# Altium PCB RUMBA_V2.PcbDoc (part 1 of 2)
Units mm, origin at the board's own origin, x right, y up, seen from the top; angles counter-clockwise.
Board outline 135 x 75 mm, 2 copper layers (Top Layer, Bottom Layer); 186 components, 178 nets, 812 pads, 160 vias.
Unrouted connection lines stored in the file: 153.
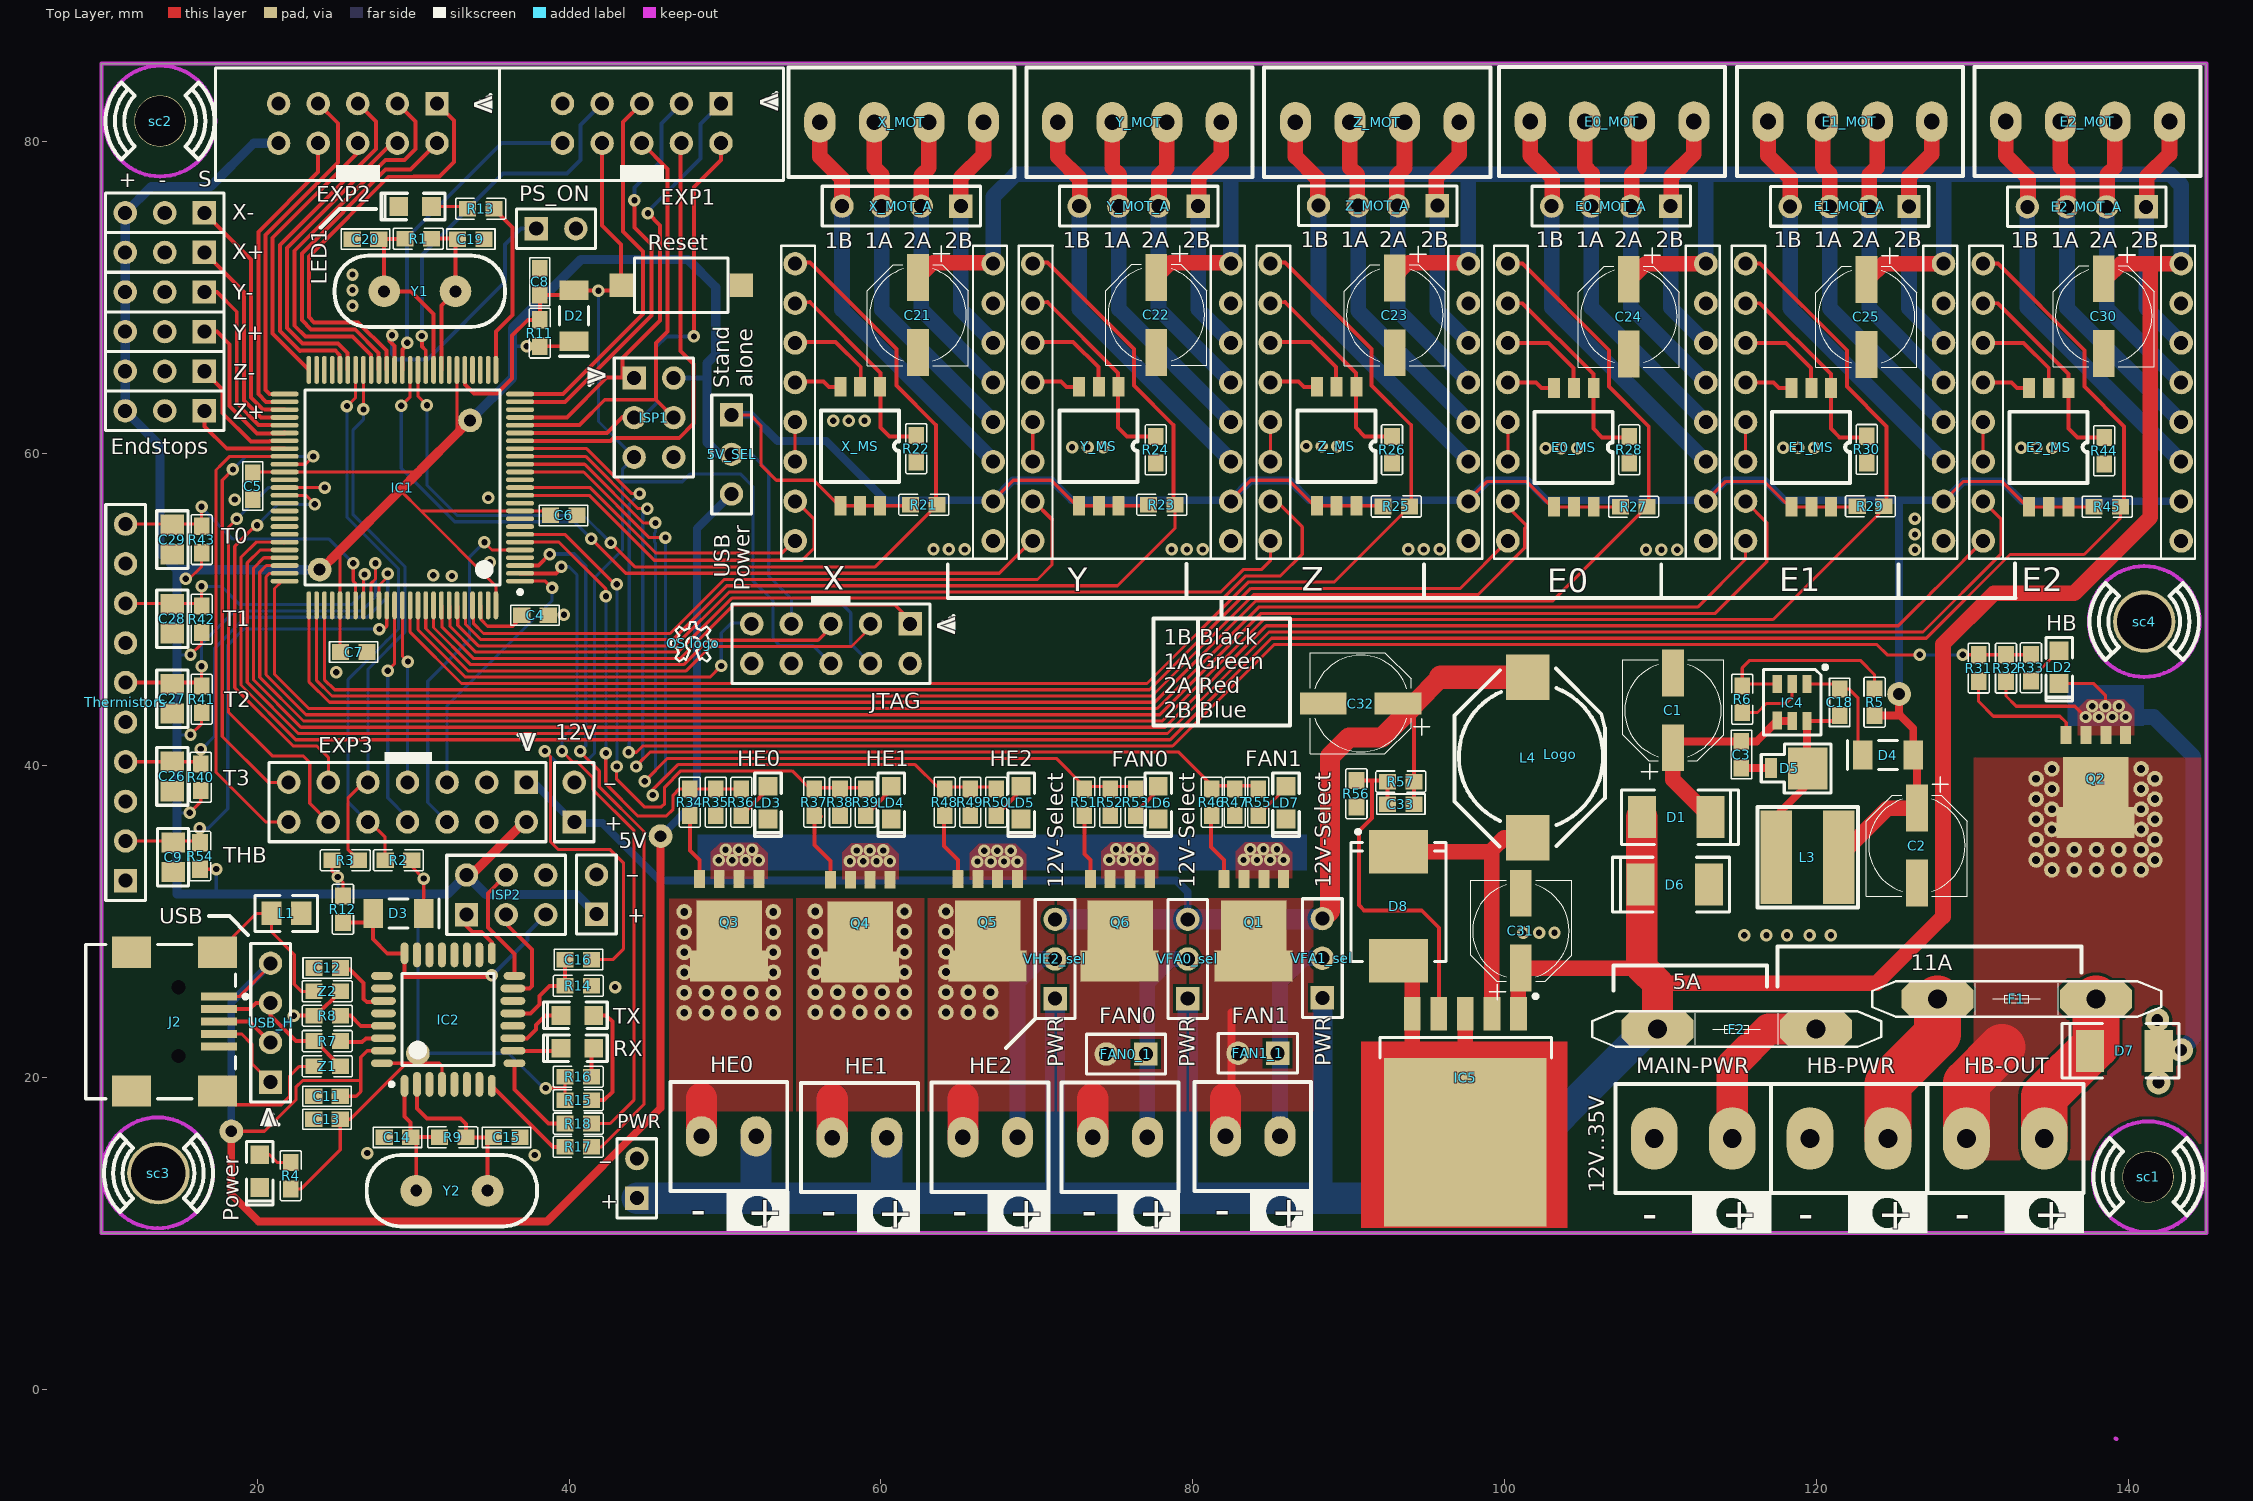
[diagram p0: Top Layer view]
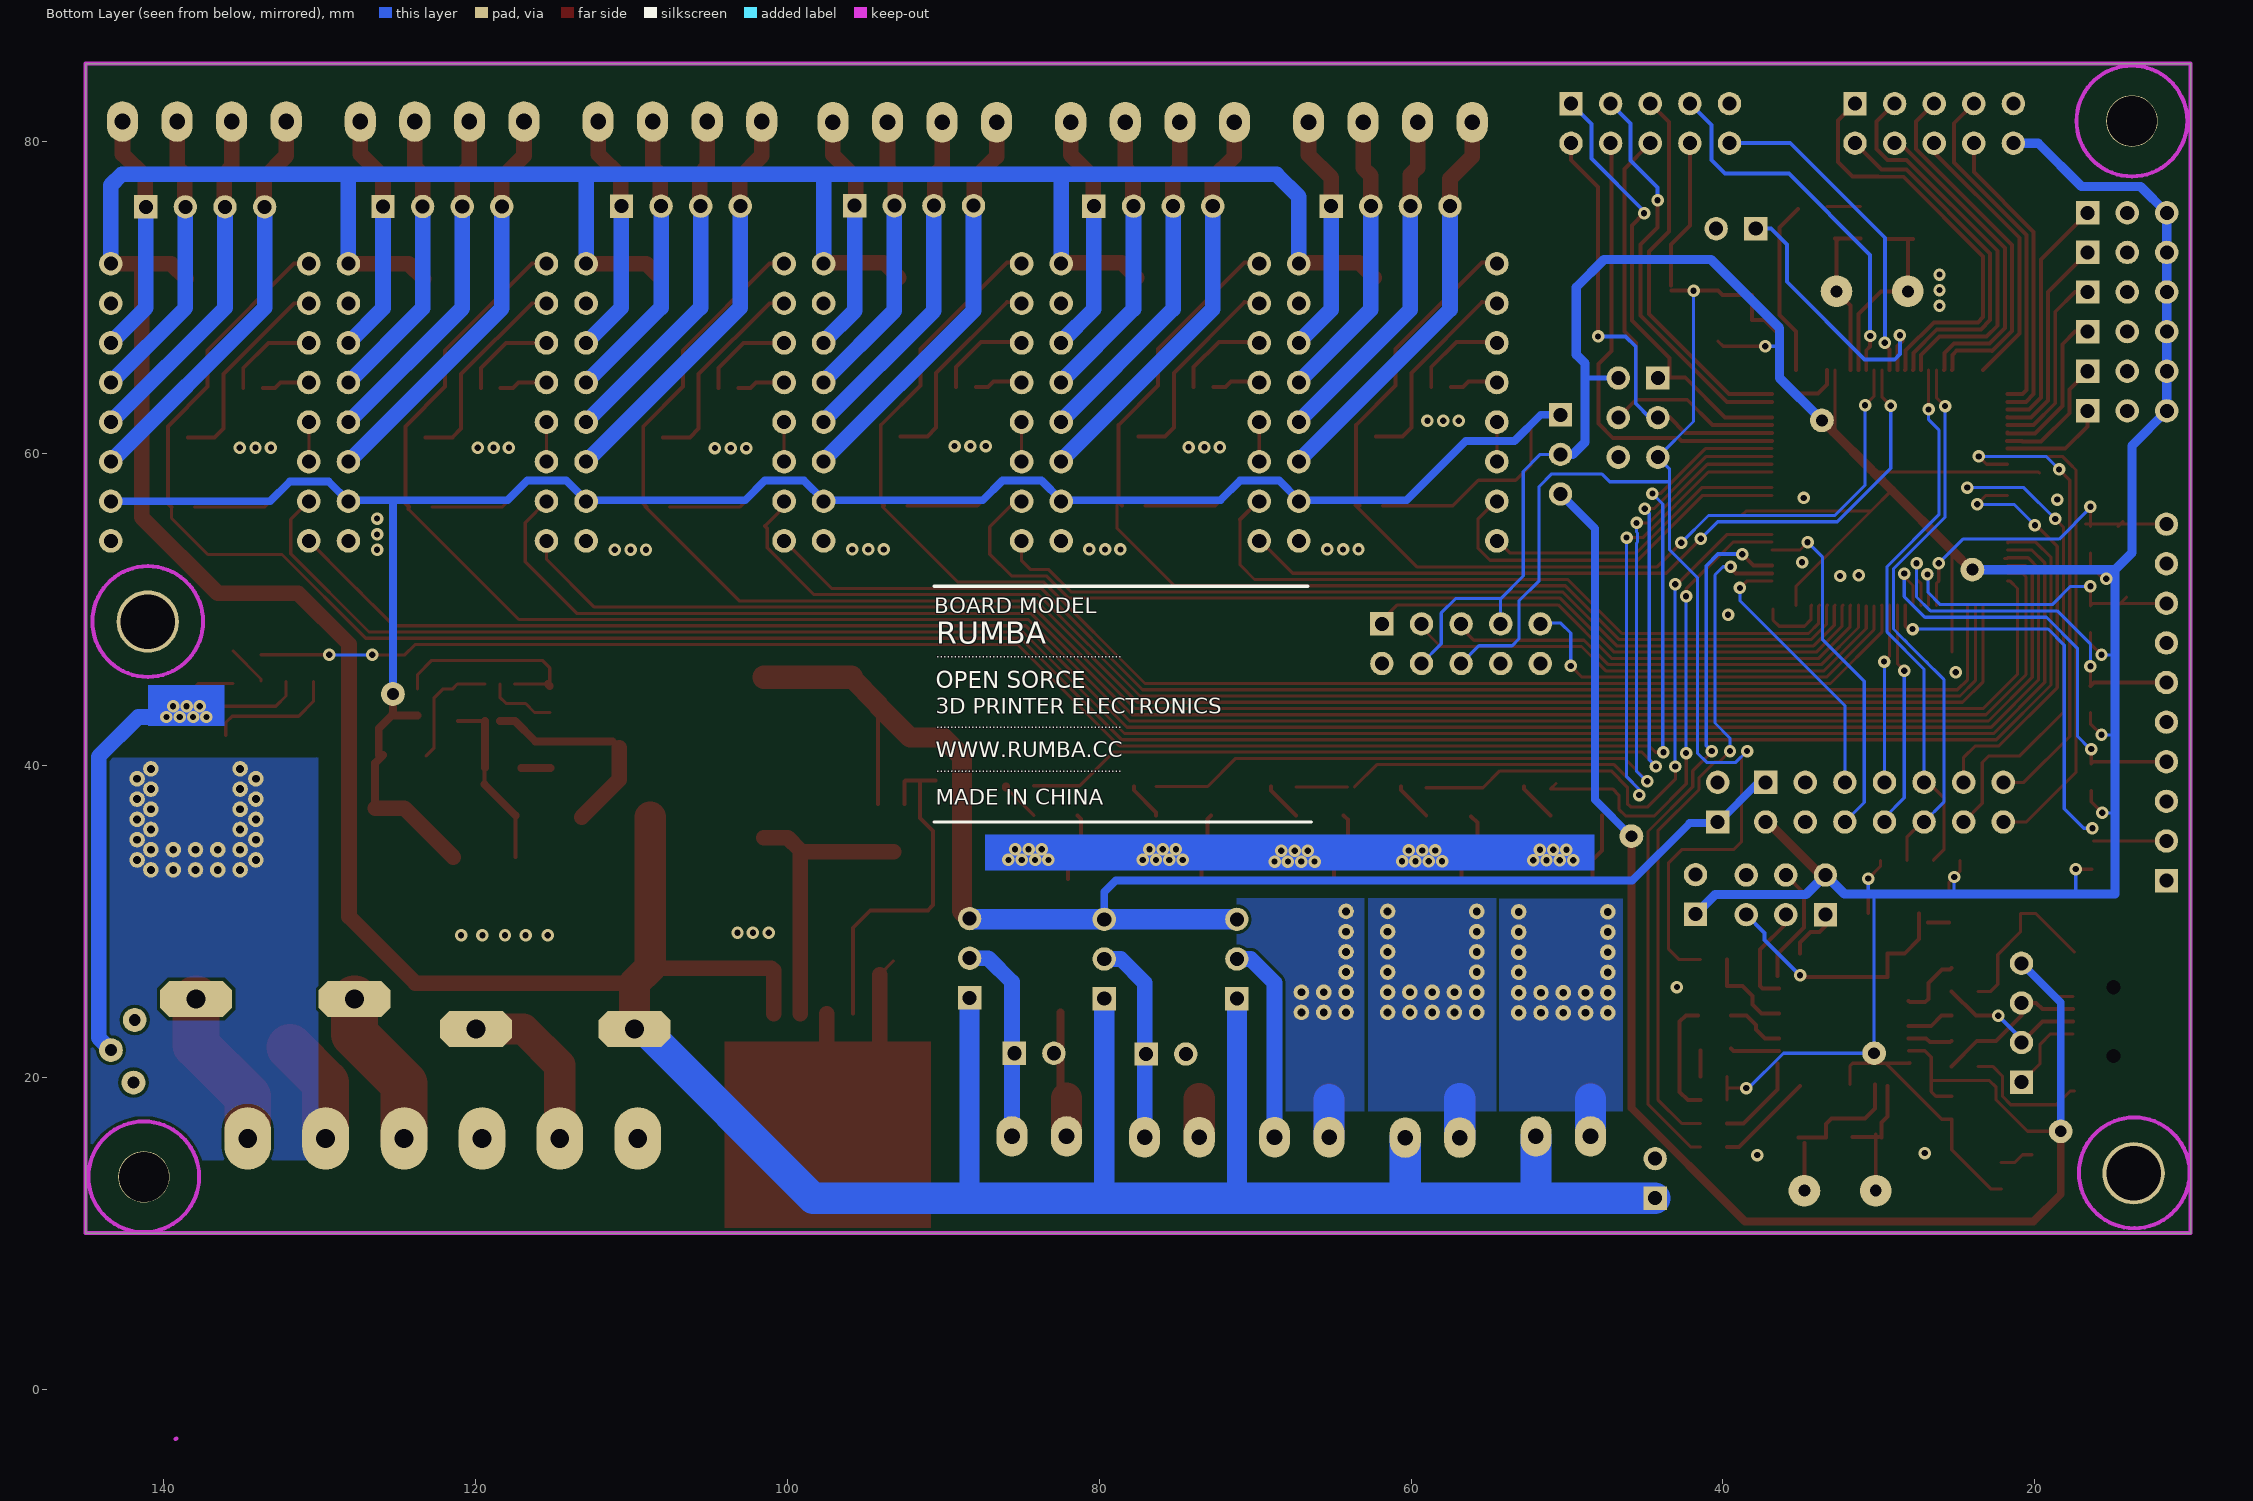
[diagram p1: Bottom Layer view, seen from below]
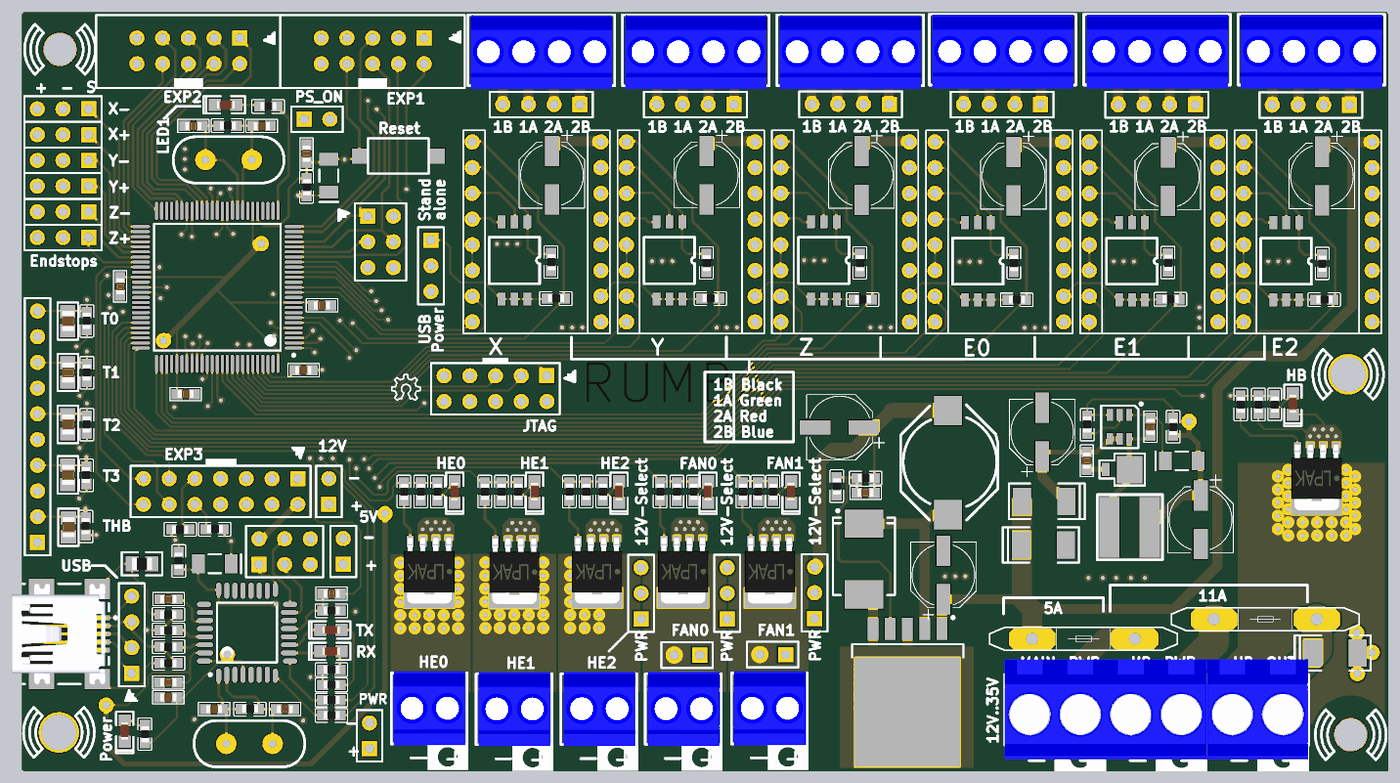
[diagram p3: 3D render of the assembled board from above, using the file's embedded part models]

## Layer stack, top to bottom
Top Layer: signal copper 0.0356
Dielectric: dielectric 0.32, FR-4, Dk 4.8
Bottom Layer: signal copper 0.0356

## Board outline
10,10 10,85 145,85 145,10

## Design rules (kind name [scope] priority, off if disabled: settings)
Clearance [All] p1: gap=0.2
HoleSize [All] p1: absolutevalues=TRUE maxlimit=4 minlimit=0.025 maxpercent=80.000 minpercent=20.000
MinimumSolderMaskSliver [All] p1: minsoldermaskwidth=0
PolygonConnect PolygonConnect_1 [All] p1: connectstyle=Relief reliefconductorwidth=0.254 reliefentries=4 polygonreliefangle="90 Angle"
RoutingVias [All] p1: holewidth=0.4 width=0.8 viastyle="Through Hole" minholewidth=0.2 minwidth=0.6 maxholewidth=1 maxwidth=1.27
SilkToSilkClearance [All] p1: silktosilkclearance=0.1
SilkscreenOverComponentPads [All] p1: minsilkscreentomaskgap=0
SolderMaskExpansion [All] p1: expansion=0.102
Width Width_1 [All] p1: maxlimit=3 minlimit=0.1 preferedwidth=0.2 minimp=50.000000 maximp=50.000000 favimp=50.000000
24 further rules are at their usual default settings.

## Components (designator, comment, footprint, x,y, rotation, side; value= is the part's Value field where it differs from the comment)
5V "Header 2" HDR1X2 41.758,30.455 r90 top
5V_SEL "Header 3" HDR1X3 50.419,62.484 r270 top
12V "Header 2" HDR1X2 40.335,36.373 r90 top
C1 "Cap Pol3" "CAP EL PANASONIC" 110.795,45.974 r180 top
C2 "Cap Pol3" "CAP EL PANASONIC" 126.441,32.41 r0 top
C3 "Cap Semi" "CAP 1608-0603" 115.189,40.691 r90 top
C4 "Cap Semi" "CAP 1608-0603" 37.821,49.632 r180 top
C5 "Cap Semi" "CAP 1608-0603" 19.71,57.912 r90 top
C6 "Cap Semi" "CAP 1608-0603" 39.649,56.032 r180 top
C7 "Cap Semi" "CAP 1608-0603" 26.187,47.269 r180 top
C8 "Cap Semi" "CAP 1608-0603" 38.125,71.018 r270 top
C9 "Cap Semi" Cap2012-0805 14.605,34.112 r90 top
C11 "Cap Semi" "CAP 1608-0603" 24.475,18.778 r0 top
C12 "Cap Semi" "CAP 1608-0603" 24.488,27.008 r0 top
C13 "Cap Semi" "CAP 1608-0603" 24.475,17.305 r0 top
C14 "Cap Semi" "CAP 1608-0603" 28.996,16.143 r0 top
C15 "Cap Semi" "CAP 1608-0603" 35.996,16.143 r180 top
C16 "Cap Semi" "CAP 1608-0603" 40.6,27.546 r180 top
C18 "Cap Semi" "CAP 1608-0603" 121.488,44.044 r90 top
C19 "Cap Semi" "CAP 1608-0603" 33.699,73.752 r180 top
C20 "Cap Semi" "CAP 1608-0603" 26.949,73.752 r0 top
C21 "Cap Pol3" "CAP EL PANASONIC" 62.374,66.434 r0 top
C22 "Cap Pol3" "CAP EL PANASONIC" 77.665,66.436 r0 top
C23 "Cap Pol3" "CAP EL PANASONIC" 92.956,66.41 r0 top
C24 "Cap Pol3" "CAP EL PANASONIC" 107.968,66.334 r0 top
C25 "Cap Pol3" "CAP EL PANASONIC" 123.208,66.309 r0 top
C26 "Cap Semi" Cap2012-0805 14.554,39.294 r90 top
C27 "Cap Semi" Cap2012-0805 14.554,44.272 r90 top
C28 "Cap Semi" Cap2012-0805 14.554,49.403 r90 top
C29 "Cap Semi" Cap2012-0805 14.554,54.483 r90 top
C30 "Cap Pol3" "CAP EL PANASONIC" 138.422,66.36 r0 top
C31 "Cap Pol3" "CAP EL PANASONIC" 101.041,31.852 r180 top
C32 "Cap Pol3" "CAP EL PANASONIC" 88.316,43.967 r270 top
C33 "Cap Semi" "Cap 1608-0603" 93.346,37.516 r180 top
D1 "M4" "1N4007 SMD" 107.391,38.557 r270 top
D2 "CD1206-S01575" "1N4148 SMD" 40.324,68.842 r90 top
D3 "CD1206-S01575" "1N4148 SMD" 29.058,30.505 r180 top
D4 "Diode" "1N4148 SMD" 124.587,40.665 r0 top
D5 "Diode schottky" MBRM140 119.431,39.802 r180 top
D6 "M4" "1N4007 SMD" 114.529,30.48 r90 top
D7 "M4" "1N4007 SMD" 143.358,19.812 r90 top
D8 "MURS320" MURS320 93.193,30.963 r90 top
E0 "A4988BREAKOUT" A4988BREAKOUT 100.211,72.176 r270 top locked
E0_MOT "Header 4" "TERM4 3.5MM" 101.643,81.295 r0 top
E0_MOT_A "Header 4" HDR1X4 110.642,75.87 r180 top
E0_MS "SW DIP-3" "DIPSW SO6" 105.716,64.204 r270 top
E1 "A4988BREAKOUT" A4988BREAKOUT 115.451,72.176 r270 top locked
E1_MOT "Header 4" "TERM4 3.5MM" 116.893,81.295 r0 top
E1_MOT_A "Header 4" HDR1X4 125.933,75.844 r180 top
E1_MS "SW DIP-3" "DIPSW SO6" 120.942,64.204 r270 top
E2 "A4988BREAKOUT" A4988BREAKOUT 130.691,72.176 r270 top locked
E2_MOT "Header 4" "TERM4 3.5MM" 132.143,81.295 r0 top
E2_MOT_A "Header 4" HDR1X4 141.148,75.819 r180 top
E2_MS "SW DIP-3" "DIPSW SO6" 136.168,64.204 r270 top
EXP1 "Header 5X2" "HDR2X5_EXP INER ONLY\" 53.746,84.746 r180 top
EXP2 "Header 5X2" "HDR2X5_EXP INER ONLY\" 35.535,84.746 r180 top
EXP3 "Header 7X2" HDR2X7 37.262,38.913 r180 top
F1 "MFR1100" MFR500 132.842,25.019 r0 top
F2 "MFR500" MFR500 114.884,23.089 r180 top
FAN0 "PORT 2 pina_0.2" "TERM2 3.5mm" 77.089,16.154 r180 top
FAN0_1 "PORT 2 pina_0.2" HDR1X2 76.987,21.488 r180 top
FAN1 "PORT 2 pina_0.2" "TERM2 3.5mm" 85.598,16.205 r180 top
FAN1_1 "PORT 2 pina_0.2" HDR1X2 85.446,21.539 r180 top
HB-OUT "PORT 2 pina_0.2" "TERM2 5MM" 129.616,16.078 r0 top
HB-PWR "PORT 2 pina_0.2" "TERM2 5MM" 119.583,16.078 r0 top
HE0 "PORT 2 pina_0.2" "TERM2 3.5MM" 51.994,16.205 r180 top
HE1 "PORT 2 pina_0.2" "TERM2 3.5MM" 60.376,16.129 r180 top
HE2 "PORT 2 pina_0.2" "TERM2 3.5mm" 68.758,16.154 r180 top
IC1 "ATMEGA2560" TQFP100N 29.31,57.817 r180 top locked
IC2 "ATMEGA16U2-AU" TQFP32N 32.248,23.697 r90 top
IC4 "LT1933ES6" SOT23-6N 118.44,44.044 r270 top
IC5 "LM2596" TO-263 97.486,18.491 r270 top
ISP1 "Header 3X2" HDR2X3 44.171,64.846 r270 top
ISP2 "Header 3X2" HDR2X3 33.426,30.429 r0 top
J2 "USB conector" USB_MINI/SM0.8-6H5 9.703,23.571 r180 top
JTAG "Header 5X2" HDR2X5 61.874,49.073 r180 top
L1 "Zavojnica" "RES 2012-0805" 21.869,30.505 r0 top
L3 "Zavojnica" INDUCTOR_MSS6122D 117.424,34.112 r270 top
L4 "Inductor" DO3316P 101.498,35.357 r90 top
LD2 "GREEN" "LED 0805" 135.56,47.346 r270 top
LD3 "GREEN" "LED 0805" 52.756,38.659 r270 top
LD4 "GREEN" "LED 0805" 60.658,38.659 r270 top
LD5 "GREEN" "LED 0805" 68.99,38.659 r270 top
LD6 "GREEN" "LED 0805" 77.778,38.659 r270 top
LD7 "GREEN" "LED 0805" 85.979,38.659 r270 top
LED1 "YELLOW" "LED 0805" 31.183,75.844 r180 top
Logo "Logo" "TAURINO LOGO HIGH" 103.556,40.716 r270 top
MAIN-PWR "PORT 2 pina_0.2" "TERM2 5MM" 109.601,16.078 r0 top (schematic designator Main-PWR)
"OS logo" "Logo" "OS LOGO TOP" 47.981,47.828 r0 top
Power "GREEN" "LED 0805" 20.168,15.029 r270 top
PS_ON "Header 2" HDR1X2 37.897,74.422 r0 top
PWR "Header 2" HDR1X2 44.348,12.243 r90 top
Q1 "PSMN7R0-60YS" LFPACK 85.827,32.727 r180 top
Q2 "PSMN7R0-60YS" LFPACK 139.827,41.935 r180 top
Q3 "PSMN7R0-60YS" LFPACK 52.174,32.727 r180 top
Q4 "PSMN7R0-60YS" LFPACK 60.579,32.664 r180 top
Q5 "PSMN7R0-60YS" LFPACK 68.759,32.727 r180 top
Q6 "PSMN7R0-60YS" LFPACK 77.242,32.727 r180 top
R1 "Res3" "RES 1608-0603" 30.328,73.782 r0 top
R2 "Res3" "RES 1608-0603" 29.058,33.909 r0 top
R3 "Res3" "RES 1608-0603" 25.654,33.909 r180 top
R4 "Res3" "RES 1608-0603" 22.149,13.691 r270 top
R5 "Res3" "RES 1608-0603" 123.723,44.044 r270 top
R6 "Res3" "RES 1608-0603" 115.24,44.247 r90 top
R7 "Res3" "RES 1608-0603" 24.498,22.324 r180 top
R8 "Res3" "RES 1608-0603" 24.498,23.947 r180 top
R9 "Res3" "RES 1608-0603" 32.537,16.154 r0 top
R11 "Res3" "RES 1608-0603" 38.132,67.729 r270 top
R12 "Res3" "RES 1608-0603" 25.502,30.785 r90 top
R13 "Res3" "RES 1608-0603" 34.333,75.692 r0 top
R14 "Res3" "RES 1608-0603" 40.589,25.857 r0 top
R15 "Res3" "RES 1608-0603" 40.584,18.531 r0 top
R16 "Res3" "RES 1608-0603" 40.584,20.031 r0 top
R17 "Res3" "RES 1608-0603" 40.584,15.531 r0 top
R18 "Res3" "RES 1608-0603" 40.584,17.031 r0 top
R21 "Res3" "RES 1608-0603" 62.756,56.708 r0 top
R22 "Res3" "RES 1608-0603" 62.273,60.314 r270 top
R23 "Res3" "RES 1608-0603" 78.021,56.708 r0 top
R24 "Res3" "RES 1608-0603" 77.615,60.238 r270 top
R25 "Res3" "RES 1608-0603" 93.058,56.606 r0 top
R26 "Res3" "RES 1608-0603" 92.778,60.238 r270 top
R27 "Res3" "RES 1608-0603" 108.272,56.581 r0 top
R28 "Res3" "RES 1608-0603" 107.993,60.238 r270 top
R29 "Res3" "RES 1608-0603" 123.462,56.631 r0 top
R30 "Res3" "RES 1608-0603" 123.221,60.262 r270 top
R31 "Res3" "RES 1608-0603" 130.404,46.242 r270 top
R32 "Res3" "RES 1608-0603" 132.156,46.242 r270 top
R33 "Res3" "RES 1608-0603" 133.756,46.253 r270 top
R34 "Res3" "RES 1608-0603" 47.751,37.643 r270 top
R35 "Res3" "RES 1608-0603" 49.402,37.643 r270 top
R36 "Res3" "RES 1608-0603" 51.053,37.643 r270 top
R37 "Res3" "RES 1608-0603" 55.727,37.643 r270 top
R38 "Res3" "RES 1608-0603" 57.378,37.643 r270 top
R39 "Res3" "RES 1608-0603" 59.029,37.643 r270 top
R40 "Res3" "RES 1608-0603" 16.383,39.243 r90 top
R41 "Res3" "RES 1608-0603" 16.434,44.247 r90 top
R42 "Res3" "RES 1608-0603" 16.434,49.378 r90 top
R43 "Res3" "RES 1608-0603" 16.434,54.483 r90 top
R44 "Res3" "RES 1608-0603" 138.447,60.182 r270 top
R45 "Res3" "RES 1608-0603" 138.652,56.585 r0 top
R46 "Res3" "RES 1608-0603" 81.229,37.643 r270 top
R47 "Res3" "RES 1608-0603" 82.702,37.643 r270 top
R48 "Res3" "RES 1608-0603" 64.084,37.643 r270 top
R49 "Res3" "RES 1608-0603" 65.735,37.643 r270 top
R50 "Res3" "RES 1608-0603" 67.386,37.643 r270 top
R51 "Res3" "RES 1608-0603" 73.05,37.643 r270 top
R52 "Res3" "RES 1608-0603" 74.701,37.643 r270 top
R53 "Res3" "RES 1608-0603" 76.352,37.643 r270 top
R54 "Res3" "RES 1608-0603" 16.332,34.188 r90 top
R55 "Res3" "RES 1608-0603" 84.201,37.643 r270 top
R56 "Res3" "RES 1608-0603" 90.5,38.176 r270 top
R57 "Res3" "RES 1608-0603" 93.346,38.964 r0 top
Reset "" "SW-PB SMD 2PIN" 47.193,70.79 r180 top
RX "YELLOW" "LED 0805" 41.589,21.857 r180 top
sc1 "Sraf" "SRAF 3MM - RUPA 3.2" 141.275,13.614 r45 top
sc2 "Sraf" "SRAF 3MM - RUPA 3.2" 13.773,81.325 r45 top
sc3 "Sraf" "Sraf 3mm - rupa 3.5" 13.665,13.843 r45 top
sc4 "Sraf" "SRAF 3MM - RUPA 3.5" 141.021,49.225 r45 top
Thermistors "Header 10" HDR1X10 11.557,32.614 r90 top
TX "YELLOW" "LED 0805" 41.589,23.966 r180 top
USB_H "Header 4" HDR1X4 20.853,19.685 r90 top
VFA0_sel "Header 3" HDR1X3 79.68,25.044 r90 top
VFA1_sel "Header 3" HDR1X3 88.316,25.095 r90 top
VHE2_sel "Header 3" HDR1X3 71.171,25.044 r90 top
X "A4988BREAKOUT" A4988BREAKOUT 54.499,72.176 r270 top locked
X+ "Header 3" HDR1X3 16.612,72.898 r180 top (schematic designator Xmax)
X- "Header 3" HDR1X3 16.612,75.438 r180 top (schematic designator Xmin)
X_MOT "Header 4" "TERM4 3.5MM" 56.081,81.244 r0 top locked
X_MOT_A "Header 4" HDR1X4 65.126,75.87 r180 top
X_MS "SW DIP-3" "DIPSW SO6" 59.941,64.278 r270 top
Y "A4988BREAKOUT" A4988BREAKOUT 69.739,72.176 r270 top locked
Y1 "16MHz" X-TAL 32.716,70.404 r180 top
Y2 "16MHz" X-TAL 34.773,12.725 r180 top
Y+ "Header 3" HDR1X3 16.612,67.818 r180 top (schematic designator Ymax)
Y- "Header 3" HDR1X3 16.612,70.358 r180 top (schematic designator Ymin)
Y_MOT "Header 4" "TERM4 3.5MM" 71.331,81.244 r0 top
Y_MOT_A "Header 4" HDR1X4 80.34,75.87 r180 top
Y_MS "SW DIP-3" "DIPSW SO6" 75.246,64.278 r270 top
Z "A4988BREAKOUT" A4988BREAKOUT 84.979,72.176 r270 top locked
Z1 "VARISTOR" "RES 1608-0603" 24.498,20.697 r180 top
Z2 "VARISTOR" "RES 1608-0603" 24.488,25.508 r180 top
Z+ "Header 3" HDR1X3 16.612,62.738 r180 top (schematic designator Zmax)
Z- "Header 3" HDR1X3 16.612,65.278 r180 top (schematic designator Zmin)
Z_MOT "Header 4" "TERM4 3.5MM" 86.581,81.244 r0 top
Z_MOT_A "Header 4" HDR1X4 95.682,75.895 r180 top
Z_MS "SW DIP-3" "DIPSW SO6" 90.5,64.278 r270 top

## Footprints (in the part's own frame and the unit in brackets; to place one, negate y for a bottom-side part, rotate by r counter-clockwise, add the part's x,y. Pads: shape width x height; smd on the part's side, far side on the other; paste and mask are expansions set on the pad)
"1N4007 SMD" [mm]
  rect 2.7x1.8 smd: 1(1.88,1.407) 2(1.88,5.807)
  silkscreen extent 0.13,0.11 3.63,7.62
"1N4148 SMD" [mm] "MELF Diode, 2-Leads, Body 3.5x1.7mm, IPC Medium Density"
  rect 1.25x1.85 smd: 1(1.625,0) 2(-1.625,0)
  silkscreen extent -2.6,-0.93 0.6,0.93, body extent -1.85,-0.85 1.85,0.85, height 1.7
A4988BREAKOUT [mm]
  round 1.51 hole 0.9: 1(0,0) 2(2.54,0) 3(5.08,0) 4(7.62,0) 5(10.16,0) 6(12.7,0) 7(15.24,0) 8(17.78,0) 9(17.78,12.7) 10(15.24,12.7) 11(12.7,12.7) 12(10.16,12.7) 13(7.62,12.7) 14(5.08,12.7) 15(2.54,12.7) 16(0,12.7)
  silkscreen extent -1.14,-0.89 18.92,13.59
Cap2012-0805 [mm]
  rect 1.3x1.5 smd: 1(-0.95,0) 2(0.95,0)
  silkscreen extent -1.85,-1 1.85,1, body extent -1,-0.65 1,0.6, height 1.5
"CAP 1608-0603" [mm]
  rect 1.1x1 smd: 1(-0.85,0) 2(0.85,0)
  silkscreen extent -1.55,-0.65 1.55,0.65, body extent -0.8,-0.4 0.8,0.4, height 0.4
"Cap 1608-0603" [mm]
  rect 1.1x1 smd: 1(-0.85,0) 2(0.85,0)
  silkscreen extent -1.55,-0.65 1.55,0.65, body extent -0.8,-0.4 0.8,0.4, height 0.4
"CAP EL PANASONIC" [mil]
  rect 55x118 smd: 1(0,190.97) 2(0,1.97)
  silkscreen extent -128,-31 127,271
"DIPSW SO6" [mil]
  rect 50x30 smd: 1(0,0) 2(0,-50) 3(0,-100) 4(300,-100) 5(300,-50) 6(300,0)
  silkscreen extent 60,-149 240,48
DO3316P [mm] "SMT Power Inductors"
  rect 2.92x2.79 smd: 1(0,0) 2(10.29,0)
  silkscreen extent -0.55,-4.93 10.86,4.7
HDR1X2 [mm] "Connector; Header; 2 Position"
  rect 1.5x1.5 hole 0.9: 1(0,0)
  round 1.5 hole 0.9: 2(2.54,0)
  silkscreen extent -1.27,-1.27 3.81,1.27
HDR1X3 [mm] "Connector; Header; 3 Position"
  rect 1.5x1.5 hole 0.9: 1(0,0)
  round 1.5 hole 0.9: 2(2.54,0) 3(5.08,0)
  silkscreen extent -1.27,-1.27 6.35,1.27
HDR1X4 [mm] "Connector; Header; 4 Position"
  rect 1.5x1.5 hole 0.9: 1(0,0)
  round 1.5 hole 0.9: 2(2.54,0) 3(5.08,0) 4(7.62,0)
  silkscreen extent -1.27,-1.27 8.89,1.27
HDR1X10 [mm] "Connector; Header; 10 Position"
  rect 1.5x1.5 hole 0.9: 1(0,0)
  round 1.5 hole 0.9: 2(2.54,0) 3(5.08,0) 4(7.62,0) 5(10.16,0) 6(12.7,0) 7(15.24,0) 8(17.78,0) 9(20.32,0) 10(22.86,0)
  silkscreen extent -1.27,-1.27 24.13,1.27
HDR2X3 [mm] "Connector; Header; 3x2 Position"
  rect 1.5x1.5 hole 0.9: 1(0,0)
  round 1.5 hole 0.9: 2(0,2.54) 3(2.54,0) 4(2.54,2.54) 5(5.08,0) 6(5.08,2.54)
  silkscreen extent -1.27,-1.27 6.35,3.81
HDR2X5 [mm] "Connector; Header; 5x2 Position"
  rect 1.5x1.5 hole 0.9: 1(0,0)
  round 1.5 hole 0.9: 2(0,2.54) 3(2.54,0) 4(2.54,2.54) 5(5.08,0) 6(5.08,2.54) 7(7.62,0) 8(7.62,2.54) 9(10.16,0) 10(10.16,2.54)
  silkscreen extent -1.27,-1.27 11.43,3.81
"HDR2X5_EXP INER ONLY\" [mm] "Connector; Header; 5x2 Position"
  rect 1.5x1.5 hole 0.9: 1(4.004,2.302)
  round 1.5 hole 0.9: 2(4.004,4.842) 3(6.544,2.302) 4(6.544,4.842) 5(9.084,2.302) 6(9.084,4.842) 7(11.624,2.302) 8(11.624,4.842) 9(14.164,2.302) 10(14.164,4.842)
  silkscreen extent 0,0.03 18.2,7.23
HDR2X7 [mm] "Connector; Header; 7x2 Position"
  rect 1.5x1.5 hole 0.9: 1(0,0)
  round 1.5 hole 0.9: 2(0,2.54) 3(2.54,0) 4(2.54,2.54) 5(5.08,0) 6(5.08,2.54) 7(7.62,0) 8(7.62,2.54) 9(10.16,0) 10(10.16,2.54) 11(12.7,0) 12(12.7,2.54) 13(15.24,0) 14(15.24,2.54)
  silkscreen extent -1.27,-1.27 16.51,3.81
INDUCTOR_MSS6122D [mm]
  rect 6x2 smd: 1(0,0) 2(0,4)
  silkscreen extent -3.22,-1.2 3.22,5.25
"LED 0805" [mm]
  rect 1.2x1.2 smd: 1(0,0) 2(2.1,0)
  silkscreen extent -0.86,-0.85 3.22,0.85, body extent 0.18,-0.4 1.88,0.4, height 0.65
LFPACK [mm]
  rect 0.7x1.15 smd: 1(3.81,0) 3(0,0) 3(1.27,0) 3(2.54,0)
  rect 4.2x3.2 smd: 2(1.905,3)
  rect 5x2 smd: 2(1.93,5.588)
  body extent -0.58,-0.33 4.42,6.14, height 1.1
MBRM140 [mm]
  rect 0.762x1.27 smd: 1(2.351,-0.025)
  rect 2.54x2.67 smd: 2(0,0)
  silkscreen extent -1.5,-1.58 2.98,1.58
MFR500 [mm]
  oct 4.6x2.3 hole 1.2: 1(-5.08,0) 2(5.08,0)
  silkscreen extent -9.27,-1.14 9.27,1.14
MURS320 [mm] "Molded Diode, 2-Leads, Body 6.8x5.8mm, IPC Medium Density"
  rect 2.8x3.8 smd: 1(-3.5,0) 2(3.5,0)
  silkscreen extent -3.55,-3.05 4.9,3.05, body extent -3.55,-3.05 3.55,3.05, height 2.13
"OS LOGO TOP" [mm]
  silkscreen extent -1.45,-1.17 1.37,1.37
"RES 1608-0603" [mm]
  rect 1.1x1 smd: 1(-0.85,0) 2(0.85,0)
  silkscreen extent -1.6,-0.68 1.6,0.67, body extent -0.77,-0.38 0.82,0.43, height 0.4
"RES 2012-0805" [mm]
  rect 1.3x1.5 smd: 1(-0.95,0) 2(0.95,0)
  silkscreen extent -2,-1.15 2,1.15, body extent -1,-0.63 1,0.63, height 1.5
SOT23-6N [mm] "SOT23, 6-Leads, Body 3.0x3.0mm (max), Pitch 0.95mm, IPC Medium Density"
  rect 1.15x0.6 smd: 1(-1.175,0.95) 2(-1.175,0) 3(-1.175,-0.95) 4(1.175,-0.95) 5(1.2,0) 6(1.2,0.95)
  silkscreen extent -2.37,-1.82 2.1,2.25, body extent -0.85,-1.5 0.85,1.5, height 1.45
"SRAF 3MM - RUPA 3.2" [mm]
  round 3.3 hole 3.2: 0(0,0)
  silkscreen extent -3.5,-3.5 3.5,3.5
"Sraf 3mm - rupa 3.5" [mm]
  round 4 hole 3.5: 0(0,0)
  silkscreen extent -3.5,-3.5 3.5,3.5
"SRAF 3MM - RUPA 3.5" [mm]
  round 4 hole 3.5: 0(0,0)
  silkscreen extent -3.5,-3.5 3.5,3.5
"SW-PB SMD 2PIN" [mm]
  rect 1.5x1.5 smd: 1(-3.85,0) 2(3.85,0)
  silkscreen extent -3,-1.75 3,1.75
"TAURINO LOGO HIGH" [mm]
"TERM2 3.5mm" [mm]
  oval 2x2.6 hole 1: 1(0,0) 2(3.5,0)
  silkscreen extent -2,-3.5 5.5,3.5, body extent -1.85,-3.67 5.26,3.62, height 8.51
"TERM2 3.5MM" [mm]
  oval 2x2.6 hole 1: 1(0,0) 2(3.5,0)
  silkscreen extent -2,-3.5 5.5,3.5, body extent -1.85,-3.67 5.26,3.62, height 8.51
"TERM2 5MM" [mm]
  oval 3x4 hole 1.2: 1(0,0) 2(5,0)
  silkscreen extent -2.5,-3.5 7.5,3.5, body extent -2.54,-4.9 7.47,5, height 14.6
"TERM4 3.5MM" [mm]
  oval 2x2.6 hole 1: 1(0,0) 2(3.5,0) 3(7,0) 4(10.5,0)
  silkscreen extent -2,-3.5 12.5,3.5, body extent -1.73,-3.81 12.24,3.48, height 8.51
TO-263 [mm] "D2-PAK, 6-Pads, Body 10.4x8.9mm (max), IPC Medium Density"
  rect 2.16x1.07 smd: 1(-5.582,3.4) 2(-5.582,1.7) 3(-5.582,0) 4(-5.582,-1.7) 5(-5.582,-3.4)
  rect 10.8x10.41 smd: 6(2.65,0)
  silkscreen extent -6.82,-5.47 -2.75,5.52, body extent -2.87,-5.33 8.18,5.31, height 4.65
TQFP32N [mm] "TQFP, 32-Leads, Body 9.0x9.0mm (max), Pitch 0.80mm, IPC Medium Density"
  oval 1.4x0.5 smd: 1(-4.25,2.8) 8(-4.25,-2.8) 17(4.25,-2.8) 24(4.25,2.8)
  oval 1.6x0.5 smd: 2(-4.15,2) 3(-4.15,1.2) 4(-4.15,0.4) 5(-4.15,-0.4) 6(-4.15,-1.2) 7(-4.15,-2) 18(4.15,-2) 19(4.15,-1.2) 20(4.15,-0.4) 21(4.15,0.4) 22(4.15,1.2) 23(4.15,2)
  oval 0.5x1.4 smd: 9(-2.8,-4.25) 16(2.8,-4.25) 25(2.8,4.25) 32(-2.8,4.25)
  oval 0.5x1.6 smd: 10(-2,-4.15) 11(-1.2,-4.15) 12(-0.4,-4.15) 13(0.4,-4.15) 14(1.2,-4.15) 15(2,-4.15) 26(2,4.15) 27(1.2,4.15) 28(0.4,4.15) 29(-0.4,4.15) 30(-1.2,4.15) 31(-2,4.15)
  silkscreen extent -4.27,-2.95 2.95,3.75, body extent -3.5,-3.5 3.5,3.5, height 1.2
TQFP100N [mm] "TQFP, 100-Leads, Body 16.3x16.3mm (max), Pitch 0.50mm, IPC Medium Density"
  oval 1.8x0.3 smd: 1(-7.55,6) 2(-7.55,5.5) 3(-7.55,5) 4(-7.55,4.5) 5(-7.55,4) 6(-7.55,3.5) 7(-7.55,3) 8(-7.55,2.5) 9(-7.55,2) 10(-7.55,1.5) 11(-7.55,1) 12(-7.55,0.5) 13(-7.55,0) 14(-7.55,-0.5) 15(-7.55,-1) 16(-7.55,-1.5) 17(-7.55,-2) 18(-7.55,-2.5) 19(-7.55,-3) 20(-7.55,-3.5) 21(-7.55,-4) 22(-7.55,-4.5) 23(-7.55,-5) 24(-7.55,-5.5) 25(-7.55,-6) 51(7.55,-6) 52(7.55,-5.5) 53(7.55,-5) 54(7.55,-4.5) 55(7.55,-4) 56(7.55,-3.5) 57(7.55,-3) 58(7.55,-2.5) 59(7.55,-2) 60(7.55,-1.5) 61(7.55,-1) 62(7.55,-0.5) 63(7.55,0) 64(7.55,0.5) 65(7.55,1) 66(7.55,1.5) 67(7.55,2) 68(7.55,2.5) 69(7.55,3) 70(7.55,3.5) 71(7.55,4) 72(7.55,4.5) 73(7.55,5) 74(7.55,5.5) 75(7.55,6)
  oval 0.3x1.8 smd: 26(-6,-7.55) 27(-5.5,-7.55) 28(-5,-7.55) 29(-4.5,-7.55) 30(-4,-7.55) 31(-3.5,-7.55) 32(-3,-7.55) 33(-2.5,-7.55) 34(-2,-7.55) 35(-1.5,-7.55) 36(-1,-7.55) 37(-0.5,-7.55) 38(0,-7.55) 39(0.5,-7.55) 40(1,-7.55) 41(1.5,-7.55) 42(2,-7.55) 43(2.5,-7.55) 44(3,-7.55) 45(3.5,-7.55) 46(4,-7.55) 47(4.5,-7.55) 48(5,-7.55) 49(5.5,-7.55) 50(6,-7.55) 76(6,7.55) 77(5.5,7.55) 78(5,7.55) 79(4.5,7.55) 80(4,7.55) 81(3.5,7.55) 82(3,7.55) 83(2.5,7.55) 84(2,7.55) 85(1.5,7.55) 86(1,7.55) 87(0.5,7.55) 88(0,7.55) 89(-0.5,7.55) 90(-1,7.55) 91(-1.5,7.55) 92(-2,7.55) 93(-2.5,7.55) 94(-3,7.55) 95(-3.5,7.55) 96(-4,7.55) 97(-4.5,7.55) 98(-5,7.55) 99(-5.5,7.55) 100(-6,7.55)
  silkscreen extent -7.68,-6.25 6.25,6.82, body extent -7,-7 7,7, height 1.2
USB_MINI/SM0.8-6H5 [mm] "Connector; USB2.0, Type B, SM; 5 Position; Right Angle"
  rect 2.5x2 smd: 0(-7.75,-4.45) 0(-7.75,4.45) 0(-2.25,4.45) 0(-2.25,-4.45)
  rect 2.3x0.5 smd: 1(-7.85,-1.6) 2(-7.85,-0.8) 3(-7.85,0) 4(-7.85,0.8) 5(-7.85,1.6)
  round 0.6 hole 0.9 unplated: MH1(-5.25,2.2) MH2(-5.25,-2.2)
  silkscreen extent -9.68,-4.95 0.7,4.95, body extent -8.74,-4.95 0.66,4.95, height 3.9
X-TAL [mil]
  round 80 hole 30: 1(180,0) 2(0,0)
  silkscreen extent -125,-90 305,90

## Part data
5V 12V PS_ON PWR: "Header, 2-Pin"
5V_SEL VFA0_sel VFA1_sel VHE2_sel X+ X- Y+ Y- Z+ Z-: "Header, 3-Pin"
C1 C2 C21 C22 C23 C24 C25 C30 C31 C32: "Polarized Capacitor (Surface Mount)"
C3 C4 C5 C6 C7 C8 C9 C11 C12 C13 C14 C15 C16 C18 C19 C20 C26 C27 C28 C29 C33: "Capacitor (Semiconductor SIM Model)"
D1 D2 D3 D6 D7: library part Diode, "Default Diode"
D4 D5: "Default Diode"
D8: library part "Diode schottky", "Default Diode"
E0_MOT E0_MOT_A E1_MOT E1_MOT_A E2_MOT E2_MOT_A USB_H X_MOT X_MOT_A Y_MOT Y_MOT_A Z_MOT Z_MOT_A: "Header, 4-Pin"
E0_MS E1_MS E2_MS X_MS Y_MS Z_MS: "DIP Switch"
EXP1 EXP2 JTAG: "Header, 5-Pin, Dual row"
EXP3: "Header, 7-Pin, Dual row"
F1 F2: library part "Fuse 1", "Fuse"
IC1: "The high-performance, low-power Atmel 8-bit AVR RISC-based microcontroller"
IC2: library part ATMEGA16U2-MU, "High Performance, Low Power USB2.0 AVR® 8-Bit Microcontroller"
IC4: "600mA, 500kHz Step-Down  Switching Regulator in  SOT-23"
IC5: "3.0 A, Step-Down Switching  Regulator"
ISP1 ISP2: "Header, 3-Pin, Dual row"
L1 L3 L4: "MagneticCore Inductor with Winding Polarity Marking"
LD2 LD3 LD4 LD5 LD6 LD7 Power: library part "LEDG  0805", "Hyper-Bright Low Current LED OSRAM"
LED1 RX TX: library part "LEDY  0805", "Hyper-Bright Low Current LED OSRAM"
Q1 Q2 Q3 Q4 Q5 Q6: library part STP55NF06L
R1 R2 R3 R4 R5 R6 R7 R8 R9 R11 R12 R13 R14 R15 R16 R17 R18 R21 R22 R23 R24 R25 R26 R27 R28 R29 R30 R31 R32 R33 R34 R35 R36 R37 R38 R39 R40 R41 R42 R43 R44 R45 R46 R47 R48 R49 R50 R51 R52 R53 R54 R55 R56 R57: "Resistor"
Reset: library part SW-PB
Thermistors: "Header, 10-Pin"
Y1 Y2: library part XTAL, "Crystal Oscillator"
Z1 Z2: "VARISTOR_CN0603 (VARISTOR)"

## Free pads (board coordinates)
  round 1.524 hole 0.762: 0(18.339,16.535) 1(45.872,35.458) 2(33.655,62.128) 3(24.003,52.553) 4(30.302,21.539) 5(141.935,19.66) 6(141.859,23.673) 8(143.383,21.742) 9(125.298,44.577)
  round 1 hole 0.5: 2(47.384,24.13) 2(47.384,25.425) 2(47.384,26.721) 2(47.384,28.016) 2(47.384,29.312) 2(47.384,30.607) 2(48.812,24.13) 2(48.812,25.425) 2(50.241,24.13) 2(50.241,25.425) 2(51.67,24.13) 2(51.67,25.425) 2(53.099,24.13) 2(53.099,25.425) 2(53.099,26.721) 2(53.099,28.016) 2(53.099,29.312) 2(53.099,30.607) 2(55.791,24.155) 2(55.791,25.451) 2(55.791,26.746) 2(55.791,28.042) 2(55.791,29.337) 2(55.791,30.632) 2(57.22,24.155) 2(57.22,25.451) 2(58.649,24.155) 2(58.649,25.451) 2(60.077,24.155) 2(60.077,25.451) 2(61.506,24.155) 2(61.506,25.451) 2(61.506,26.746) 2(61.506,28.042) 2(61.506,29.337) 2(61.506,30.632) 2(64.173,24.155) 2(64.173,25.451) 2(64.173,26.746) 2(64.173,28.042) 2(64.173,29.337) 2(64.173,30.632) 2(65.602,24.155) 2(65.602,25.451) 2(67.031,24.155) 2(67.031,25.451) 2(134.087,33.934) 2(134.087,35.236) 2(134.087,36.538) 2(134.087,37.84) 2(134.087,39.141) 2(135.103,33.299) 2(135.103,34.595) 2(135.103,35.89) 2(135.103,37.186) 2(135.103,38.481) 2(135.103,39.776) 2(136.531,33.299) 2(136.531,34.595) 2(137.96,33.299) 2(137.96,34.595) 2(139.389,33.299) 2(139.389,34.595) 2(140.818,33.299) 2(140.818,34.595) 2(140.818,35.89) 2(140.818,37.186) 2(140.818,38.481) 2(140.818,39.776) 2(141.707,33.934) 2(141.707,35.236) 2(141.707,36.538) 2(141.707,37.84) 2(141.707,39.141)

## Via types
v1: diameter 0.8, hole 0.4, Top Layer to Bottom Layer, tented both sides, 160 vias

## Nets (pads, with @x,y where several pads share a name; then routed paths per layer and width w, separated by ;. In a path a pad name is that pad's centre, name@x,y a point inside that pad or via, vN(x,y) a via of type N, cw(c..) or ccw(c..) an arc to the next point about the centre after c; other vN are vias at no path point)
5V_DCDC: 5V_SEL.1 C2.1 D4.1 E0.10 E0_MS.4 E0_MS.5 E0_MS.6 E1.10 E1_MS.4 E1_MS.5 E1_MS.6 E2.10 E2_MS.4 E2_MS.5 E2_MS.6 L3.2 pad.9 R5.2 R21.1 R23.1 R25.1 R27.1 R29.1 R45.1 X.10 X_MS.4 X_MS.5 X_MS.6 Y.10 Y_MS.4 Y_MS.5 Y_MS.6 Z.10 Z_MS.4 Z_MS.5 Z_MS.6 | length 199.5
  Top Layer w0.2: 5V_SEL.1@50.419,62.484 51.613,62.484 52.299,61.798 52.299,59.284 53.297,58.285 55.685,58.285 57.318,56.652 R21.1@61.832,56.652 ; X.10@67.199,57.005 68.48,58.285 70.925,58.285 72.558,56.652 R23.1@77.072,56.652 ; Y.10@82.439,57.005 83.72,58.285 86.165,58.285 87.798,56.652 R25.1@92.312,56.652 ; Z.10@97.679,57.005 98.891,58.217 101.397,58.217 103.03,56.584 R27.1@107.544,56.584 ; E0.10@112.911,56.936 114.191,58.217 116.637,58.217 118.27,56.584 R29.1@122.784,56.584 ; E1.10@128.151,56.936 129.431,58.217 131.877,58.217 133.51,56.584 E2_MS.5@134.898,56.584 R45.1@138.024,56.584
  Top Layer w0.5: R5.2@123.723,43.194 125.298,43.194 ; pad.9@125.298,44.577 125.298,43.194 ; D4.1@125.933,40.665 126.441,40.157 C2.1@126.441,37.261 ; D4.1@126.212,40.665 126.212,42.368 125.386,43.194 125.298,43.194
  Top Layer w1: L3.2@121.424,34.112 124.573,37.261 C2.1@126.441,37.261
  Bottom Layer w0.5: 5V_SEL.1@50.419,62.484 51.689,62.484 53.365,60.808 56.49,60.808 60.293,57.005 67.199,57.005 68.462,58.268 70.968,58.268 72.231,57.005 82.439,57.005 83.702,58.268 86.208,58.268 87.471,57.005 97.679,57.005 98.942,58.268 101.448,58.268 102.711,57.005 112.919,57.005 114.182,58.268 116.688,58.268 117.951,57.005 125.425,57.005 ; pad.9@125.298,44.577 125.298,56.878 125.425,57.005 ; E1.10@128.151,56.936 129.414,58.199 131.919,58.199 133.182,56.936 E2.10@143.391,56.936 ; E1.10@128.159,57.005 125.425,57.005
+5V: 5V.1 5V_SEL.2 C5.2 C6.2 C7.2 C13.2 D2.2 D3.2 EXP2.10 EXP3.2 IC1.10 IC1.31 IC1.61 IC1.80 IC1.100 IC2.4 IC2.32 ISP1.2 ISP2.2 JTAG.4 JTAG.7 pad.2@33.655,62.128 pad.3 pad.4 R2.2 R3.2 R4.2 R11.2 R12.2 R15.1 R16.1 R40.1 R41.1 R42.1 R43.1 R54.1 X+.3 X-.3 Y+.3 Y-.3 Z+.3 Z-.3 | length 275.1
  Top Layer w0.2: v1@15.532,51.855 16.434,52.757 R43.1@16.434,53.633 ; v1(15.672,36.957) 16.383,37.668 R40.1@16.383,38.393 ; v1(15.723,41.961) 16.434,42.672 R41.1@16.434,43.397 ; v1(15.723,47.092) 16.434,47.803 R42.1@16.434,48.528 ; R54.1@16.332,33.338 17.082,33.338 17.094,33.35 v1(17.374,33.35) ; C5.2@19.71,58.762 19.765,58.817 IC1.61@21.76,58.817 30.344,58.817 ; R4.2@22.149,12.841 22.823,12.841 25.325,15.343 C13.2@25.325,17.305 25.967,17.305 29.558,20.897 ; R3.2@24.804,33.909 24.804,33.21 v1(25.172,32.842) 25.502,32.512 R12.2@25.502,31.635 ; C7.2@25.31,47.269 IC1.80@25.31,50.216 ; IC1.80@25.31,50.267 25.31,53.783 ; IC2.32@28.057,20.955 IC2.32@27.998,20.897 29.558,20.897 ; 29.172,57.645 30.5,56.317 ; R2.2@29.908,33.909 29.908,33.516 v1(30.683,32.741) D3.2@30.683,30.505 ; IC2.4@31.848,19.547 31.848,20.73 31.681,20.897 29.558,20.897 ; IC1.31@32.81,65.367 32.81,61.5 32.918,61.392 ; IC1.100@35.31,50.267 35.31,51.507 30.5,56.317 ; v1@37.186,66.879 R11.2@38.132,66.879 39.986,66.879 D2.2@40.324,67.217 ; v1@38.43,19.228 v1(38.506,19.304) 39.657,19.304 39.734,19.228 ; C6.2@38.799,56.032 38.515,56.317 IC1.10@36.86,56.317 30.5,56.317 ; R15.1@39.734,18.531 39.734,19.228 ; R16.1@39.734,20.031 39.734,19.228
  Top Layer w0.6: pad.3@23.978,52.476 pad.3@24.003,52.476 ; pad.3@24.041,52.514 25.31,53.783 ; 25.4,53.873 29.172,57.645 30.344,58.817 ; 30.498,58.972 32.918,61.392 pad.2@33.655,62.128 ; ISP2.2@33.426,32.969 33.731,32.969 EXP3.2@37.198,36.436 ; 5V.1@41.758,30.455 5V.1@41.758,30.495
  Bottom Layer w0.2: 14.808,36.957 14.859,36.957 v1(15.672,36.957) ; 14.859,41.961 v1(15.723,41.961) ; 14.859,47.092 v1(15.723,47.092) ; 17.374,31.826 v1(17.374,33.35) ; 25.172,31.75 v1(25.172,32.842) ; 30.353,31.75 30.302,31.699 pad.4@30.302,21.539 36.119,21.539 38.43,19.228 v1(38.506,19.304) ; 30.658,31.75 30.683,31.775 v1(30.683,32.741) ; 36.424,66.879 v1(37.287,66.879) ; 48.743,64.846 48.844,64.948 ; 5V_SEL.2@50.419,59.944 51.714,59.944 52.807,58.852 52.807,52.146 54.254,50.698 ; JTAG.7@54.254,49.073 54.254,50.698 ; JTAG.4@59.334,46.533 58.064,47.803 58.064,49.784 57.15,50.698 54.254,50.698
  Bottom Layer w0.3: ISP1.2@46.711,64.846 48.743,64.846
  Bottom Layer w0.6: EXP2.10@21.371,79.904 19.782,79.904 17.004,77.126 13.22,77.126 X-.3@11.532,75.438 X+.3@11.532,72.898 Y-.3@11.532,70.358 Y+.3@11.532,67.818 Z-.3@11.532,65.278 Z+.3@11.532,62.738 13.767,60.503 13.767,53.645 14.859,52.553 ; pad.3@24.003,52.553 14.859,52.553 ; pad.2@33.655,62.128 36.373,64.846 36.373,68.047 40.767,72.441 47.625,72.441 49.403,70.663 49.403,66.345 48.844,65.786 48.844,64.948 48.844,60.731 49.632,59.944 5V_SEL.2@50.419,59.944 ; ISP2.2@33.68,32.969 ISP2.2@33.426,32.969 ; 5V.1@41.758,30.455 40.493,31.719 34.676,31.719 ISP2.2@33.426,32.969 ; 14.859,52.553 14.859,47.092 14.859,41.961 14.859,36.957 14.859,31.75 25.171,31.75 30.353,31.75 30.658,31.75 32.207,31.75 ISP2.2@33.426,32.969
  other v1: 15.418,51.968
+12V: 12V.1 C32.1 C33.1 EXP3.1 L4.2 R57.2 VFA0_sel.3 VFA1_sel.3 VHE2_sel.3 | length 95.9
  Top Layer w0.254: C33.1@94.196,37.516 R57.2@94.196,38.964 C32.1@94.196,43.853
  Top Layer w1.3: VFA1_sel.3@88.316,30.175 88.798,30.658 88.798,40.564 90.018,41.783 92.126,41.783 C32.1@94.196,43.853 ; C32.1@94.196,43.929 95.913,45.647
  Top Layer w1.5: 95.913,45.647 L4.2@101.498,45.647
  Bottom Layer w0.5: EXP3.1@37.262,38.913 37.719,38.913 40.335,36.297 42.139,36.297 45.822,32.614 78.943,32.614 79.68,31.877 VFA0_sel.3@79.68,30.124
  Bottom Layer w1.3: VHE2_sel.3@71.171,30.124 VFA0_sel.3@79.68,30.124 VFA1_sel.3@88.265,30.124
A9: EXP3.7 IC1.88 | length 12.2
  Top Layer w0.2: 29.31,47.5 29.31,48.006 ; IC1.88@29.31,50.267 29.31,48.006 ; v1@29.667,46.736 v1(29.667,46.66) 29.31,47.017 29.31,48.006
  Bottom Layer w0.2: EXP3.7@29.642,38.913 29.642,46.711 29.667,46.736 v1(29.667,46.66)
A10: EXP3.8 IC1.87 | length 14.6
  Top Layer w0.2: v1(28.372,46.076) 28.81,46.514 IC1.87@28.81,50.267
  Bottom Layer w0.2: v1(28.372,46.076) 28.372,37.922 29.642,36.652 EXP3.8@29.642,36.373
AREF: C4.2 IC1.98 | length 4.4
  Top Layer w0.2: IC1.98@34.31,50.267 34.36,50.217 34.36,49.331 34.77,48.92 36.398,48.92 36.793,49.315 C4.2@36.793,50.038
BEEPER: EXP2.1 IC1.40 | length 27
  Top Layer w0.254: IC1.40@28.31,65.367 28.287,65.39 28.287,66.599 26.476,68.41 23.647,68.41 23.314,68.743 23.314,72.641 28.426,77.753 30.021,77.753 30.044,77.775 31.699,77.775 32.608,78.683 32.608,81.367 EXP2.1@31.531,82.444
BTN_EN1: EXP1.5 IC1.25 | length 24.5
  Top Layer w0.254: IC1.25@36.86,63.817 39.611,63.817 44.755,68.961 44.755,72.949 43.469,74.235 43.469,81.25 EXP1.5@44.663,82.444
BTN_EN2: EXP1.3 IC1.24 | length 26
  Top Layer w0.254: IC1.24@36.86,63.317 39.753,63.317 45.288,68.852 45.288,73.406 44.196,74.498 v1(44.196,76.251)
  Bottom Layer w0.254: v1(44.196,76.251) 44.196,77.064 45.923,78.791 45.923,81.165 EXP1.3@47.203,82.444
BTN_ENC: EXP2.2 IC1.41 | length 22.8
  Top Layer w0.254: IC1.41@27.81,65.367 27.787,65.39 27.787,66.457 26.288,67.956 23.459,67.956 22.86,68.555 22.86,72.829 28.238,78.207 29.833,78.207 EXP2.2@31.531,79.904
DTR: C16.2 IC2.13 R14.1 | length 6.1
  Top Layer w0.254: IC2.13@36.398,24.097 37.533,24.097 38.1,24.663 38.1,25.222 38.735,25.857 R14.1@39.739,25.857 39.75,25.868 C16.2@39.75,27.546
E0-DIR: E0.8 IC1.78 | length 84.8
  Top Layer w0.2: IC1.78@24.31,50.216 24.31,45.503 24.965,44.848 77.222,44.848 83.726,51.352 97.167,51.352 E0.8@100.211,54.396
E0-EN: E0.1 IC1.76 R27.2 | length 116.4
  Top Layer w0.2: IC1.76@23.31,50.216 23.31,45.372 24.634,44.048 77.553,44.048 84.057,50.552 103.094,50.552 R27.2@109.122,56.581
  Top Layer w0.254: E0.1@100.211,72.176 101.153,72.176 106.705,66.624 106.705,64.287 109.245,61.747 109.245,56.809 R27.2@109.022,56.585
E0-STEP: E0.7 IC1.77 | length 90.2
  Top Layer w0.2: IC1.77@23.81,50.216 23.81,45.437 24.799,44.448 77.388,44.448 83.892,50.952 98.296,50.952 101.293,53.948 101.293,55.192 ; E0.7@100.211,56.583 101.448,55.347
  Top Layer w0.254: E0.7@100.211,56.583 E0.7@100.211,56.936 ; 101.293,55.192 101.448,55.347
E1-DIR: E1.8 IC1.75 | length 106.7
  Top Layer w0.2: IC1.75@21.76,51.817 21.578,51.817 21.107,51.346 21.107,45.838 23.297,43.648 77.719,43.648 84.223,50.152 112.382,50.152 115.451,53.221 E1.8@115.451,54.396
E1-EN: E1.1 IC1.73 R29.2 | length 139.6
  Top Layer w0.2: IC1.73@21.76,52.817 20.584,52.817 20.16,52.393 20.16,45.653 22.965,42.848 78.05,42.848 84.554,49.352 117.219,49.352 R29.2@124.312,56.445
  Top Layer w0.254: E1.1@115.451,72.176 116.393,72.176 121.945,66.624 121.945,64.287 124.485,61.747 124.485,56.809 R29.2@124.262,56.585 ; R29.2@124.312,56.445 R29.2@124.312,56.631
E1-STEP: E1.7 IC1.74 | length 113.4
  Top Layer w0.2: IC1.74@21.76,52.317 20.789,52.317 20.56,52.088 20.56,45.819 23.131,43.248 77.885,43.248 84.389,49.752 113.506,49.752 116.815,53.061 116.815,55.572 E1.7@115.451,56.936
E2-DIR: E2.8 IC1.72 | length 127.9
  Top Layer w0.2: IC1.72@21.76,53.267 IC1.72@21.946,53.267 ; IC1.72@21.76,53.317 20.424,53.317 19.76,52.653 19.76,45.488 22.8,42.448 78.216,42.448 84.72,48.952 125.247,48.952 128.089,51.794 ; 127.298,51.003 128.089,51.794 ; E2.8@130.691,54.396 128.089,51.794
E2-EN: E2.1 IC1.70 R45.2 | length 160
  Top Layer w0.2: IC1.70@21.71,54.267 IC1.70@21.76,54.317 19.93,54.317 18.96,53.347 18.96,45.156 22.468,41.648 78.547,41.648 85.051,48.152 127.044,48.152 132.417,53.524 137.167,53.524 139.502,55.86 R45.2@139.502,56.585
  Top Layer w0.254: E2.1@130.691,72.176 131.633,72.176 137.185,66.624 137.185,64.287 139.725,61.747 139.725,56.809 R45.2@139.502,56.585
E2-STEP: E2.7 IC1.71 | length 132.9
  Top Layer w0.2: IC1.71@21.76,53.817 20.187,53.817 19.36,52.99 19.36,45.322 22.634,42.048 78.382,42.048 84.886,48.552 126.835,48.552 131.851,53.569 131.851,55.776 E2.7@130.691,56.936
FAN_0: IC1.17 R46.1 R47.1 R55.1 | length 67.9
  Top Layer w0.2: IC1.17@36.86,59.817 41.065,59.817 44.418,56.464 v1(45.009,56.464) ; v1(44.298,39.929) 44.475,39.929 44.475,40.132 45.191,40.848 46.279,40.848 ; 46.025,40.848 46.279,40.848 ; R55.1@84.201,38.696 81.255,38.696 79.103,40.848 46.279,40.848
  Bottom Layer w0.2: v1(44.298,39.929) 44.729,40.361 44.729,56.185 v1(45.009,56.464)
FAN_1: IC1.16 R51.1 R52.1 R53.1 | length 60.2
  Top Layer w0.2: IC1.16@36.86,59.317 40.999,59.317 44.766,55.55 v1(45.542,55.55) ; v1(44.856,38.989) 46.315,40.448 71.248,40.448 73.05,38.645 R53.1@76.352,38.645
  Bottom Layer w0.2: v1(44.856,38.989) 44.907,38.989 45.542,39.624 45.542,54.255 45.477,54.32 45.477,54.9 45.542,54.965 45.542,55.194 45.364,55.372 v1(45.542,55.55) v1@45.466,55.55
GND: 5V.2 12V.2 C1.2 C2.2 C3.1 C4.1 C5.1 C6.1 C7.1 C8.1 C9.1 C11.1 C12.1 C13.1 C14.1 C15.1 C19.1 C20.1 C21.2 C22.2 C23.2 C24.2 C25.2 C26.1 C27.1 C28.1 C29.1 C30.2 C31.2 C32.2 D5.1 D6.1 D7.1 D8.1 E0.9 E0.15 E1.9 E1.15 E2.9 E2.15 EXP1.9 EXP2.9 EXP3.3 EXP3.4 HB-PWR.1 IC1.11 IC1.32 IC1.62 IC1.81 IC1.99 IC2.3 IC2.28 IC4.2 IC5.3 IC5.5 IC5.6 ISP1.6 ISP2.6 J2.4 JTAG.2 JTAG.10 L1.2 LD2.2 LD3.2 LD4.2 LD5.2 LD6.2 LD7.2 LED1.2 MAIN-PWR.1 pad.5 pad.6 pad.8 Power.2 PS_ON.2 PWR.2 Q1.3 Q2.3 Q3.3 Q4.3 Q5.3 Q6.3 R6.1 R14.2 R22.2 R24.2 R26.2 R28.2 R30.2 R32.2 R35.2 R38.2 R44.2 R47.2 R49.2 R52.2 R56.2 Reset.1 Thermistors.1 Thermistors.3 Thermistors.5 Thermistors.7 Thermistors.9 USB_H.1 X+.2 X-.2 X.9 X.15 Y+.2 Y-.2 Y.9 Y.15 Z+.2 Z-.2 Z.9 Z.15 | length 62.5
  Top Layer w0.2: J2.4@17.553,22.771 19.012,22.771 19.66,22.123 19.66,20.879 USB_H.1@20.853,19.685 ; D8.1@93.193,27.463 D8.1@94.086,26.57 ; R6.1@115.24,43.397 116.219,43.397 116.789,43.967 118.034,43.967 118.44,44.374 IC4.2@118.44,45.219 ; D5.1@117.066,39.841 D5.1@117.08,39.827 ; R32.2@132.156,45.392 132.156,44.45 132.817,43.79 136.576,43.79 v1(137.262,43.104) ; LD2.2@135.56,45.246 137.787,45.246 138.532,44.501 v1(138.532,43.79)
  Top Layer w0.5: C3.1@115.189,39.841 D5.1@117.066,39.841
  Top Layer w1: IC5.6@94.086,20.32 D8.1@94.086,26.57 ; IC5.6@97.486,15.841 IC5.3@97.486,24.074
  Bottom Layer w1: v1(139.827,43.104) 141.63,43.104 144.173,40.561 144.173,22.532 pad.8@143.383,21.742
  other v1: 37.795,15.011 27.051,15.138 42.951,25.781 115.367,29.108 116.789,29.108 118.11,29.108 119.558,29.108 120.929,29.108 101.194,29.261 102.21,29.261 103.2,29.261 66.192,33.833 67.048,33.833 67.903,33.833 68.758,33.833 58.014,33.858 58.869,33.858 59.724,33.858 60.579,33.858 49.606,33.909 50.461,33.909 51.316,33.909 52.172,33.909 74.651,33.934 75.506,33.934 76.361,33.934 77.216,33.934 83.261,33.934 84.116,33.934 84.971,33.934 85.827,33.934 66.624,34.519 67.462,34.519 68.326,34.519 58.445,34.544 59.284,34.544 60.147,34.544 50.038,34.595 50.876,34.595 51.74,34.595 75.082,34.62 75.921,34.62 76.784,34.62 83.693,34.62 84.531,34.62 85.395,34.62 138.117,43.104 138.972,43.104 137.693,43.79 139.395,43.79 25.07,45.974 39.675,49.657 32.487,52.146 31.293,52.197 34.925,53.035 109.068,53.823 110.058,53.823 111.074,53.823 126.314,53.823 63.373,53.848 64.364,53.848 65.38,53.848 78.638,53.848 79.629,53.848 80.645,53.848 93.828,53.848 94.818,53.848 95.834,53.848 126.314,54.813 126.314,55.829 18.567,57.048 34.823,57.15 102.641,60.35 103.632,60.35 104.648,60.35 117.856,60.376 118.847,60.376 119.863,60.376 133.121,60.376 134.112,60.376 135.128,60.376 72.263,60.401 73.254,60.401 74.27,60.401 87.274,60.477 88.265,60.477 89.281,60.477 56.947,62.103 57.937,62.103 58.953,62.103 26.111,69.469 26.111,70.485 26.111,71.476
HB: IC1.18 R31.1 R32.1 R33.1 | length 119.1
  Top Layer w0.2: IC1.18@36.86,60.317 41.131,60.317 44.018,57.429 v1(44.526,57.429) ; v1(43.815,40.843) 44.323,40.843 44.728,41.248 78.713,41.248 85.217,47.752 123.876,47.752 124.537,47.092 v1(126.619,47.092) ; v1(129.388,47.092) R31.1@130.404,47.092 ; R31.1@130.683,47.092 R31.1@130.404,47.092 ; R33.1@133.756,47.103 133.745,47.092 R32.1@132.156,47.092 R31.1@130.404,47.092
  Bottom Layer w0.2: v1(43.815,40.843) 43.861,40.889 43.861,56.764 v1(44.526,57.429) ; v1(126.619,47.092) v1(129.388,47.092)
HE_0: IC1.6 R34.1 R35.1 R36.1 | length 30.5
  Top Layer w0.2: IC1.6@36.86,54.317 39.358,54.317 42.353,51.322 42.353,50.865 v1(42.367,50.851) ; v1@42.353,40.778 42.353,38.818 44.425,36.747 46.221,36.747 46.672,37.197 46.672,38.086 47.078,38.493 R36.1@51.053,38.493 R36.1@50.709,38.837
  Bottom Layer w0.2: v1(42.367,40.792) v1(42.367,50.851)
HE_1: IC1.7 R37.1 R38.1 R39.1 | length 38.8
  Top Layer w0.2: IC1.7@36.86,54.817 39.726,54.817 42.93,51.613 v1(43.053,51.613) ; v1(43.053,39.929) 43.053,39.102 44.817,37.338 45.923,37.338 46.126,37.541 46.126,38.608 47.166,39.648 54.307,39.648 55.386,38.569 R39.1@59.029,38.569
  Bottom Layer w0.2: v1@43.067,39.943 v1@43.067,51.613
HE_2: IC1.15 R48.1 R49.1 R50.1 | length 50.7
  Top Layer w0.2: IC1.15@36.86,58.817 40.934,58.817 45.141,54.61 v1(46.177,54.61) ; v1@45.364,38.43 46.982,40.048 62.199,40.048 R48.1@63.627,38.62 ; R48.1@64.084,38.62 R50.1@67.386,38.62
  Bottom Layer w0.2: v1(45.364,38.1) 45.364,38.456 46.177,39.268 v1(46.177,54.61)
J_TCK: IC1.93 JTAG.1 | length 34.6
  Top Layer w0.2: IC1.93@31.81,50.267 31.86,50.217 31.86,48.856 33.853,46.863 47.145,46.863 50.574,50.292 60.884,50.292 61.874,49.301 JTAG.1@61.874,48.844
J_TDI: IC1.90 JTAG.9 | length 27
  Top Layer w0.2: IC1.90@30.31,50.216 30.31,48.709 33.356,45.663 49.041,45.663 v1(49.759,46.38)
  Bottom Layer w0.2: v1(49.759,46.38) 49.759,48.489 50.394,49.124 51.435,49.124 JTAG.9@51.714,48.844
J_TDO: IC1.91 JTAG.3 | length 32.2
  Top Layer w0.2: IC1.91@30.81,50.216 30.81,48.775 33.522,46.063 47.511,46.063 49.073,47.625 51.112,47.625 51.114,47.623 52.315,47.623 52.317,47.625 53.652,47.625 53.654,47.623 58.113,47.623 JTAG.3@59.334,48.844
J_TMS: IC1.92 JTAG.5 | length 28.9
  Top Layer w0.2: IC1.92@31.31,50.267 31.31,48.841 33.688,46.463 47.345,46.463 48.907,48.025 51.277,48.025 51.279,48.023 52.149,48.023 52.152,48.025 53.817,48.025 53.819,48.023 55.973,48.023 JTAG.5@56.794,48.844
KILL: EXP1.10 IC1.38 | length 21.8
  Top Layer w0.254: IC1.38@29.31,65.367 29.31,66.673 29.845,67.208 29.82,67.234 29.489,67.234 v1(29.616,67.107)
  Bottom Layer w0.254: v1(29.616,67.107) 29.616,73.838 35.683,79.904 EXP1.10@39.583,79.904
LCD_D4: EXP2.5 IC1.46 | length 23
  Top Layer w0.254: IC1.46@25.31,65.367 25.287,65.39 25.287,66.315 25.008,66.594 22.746,66.594 22.735,66.583 21.466,67.851 21.466,73.384 27.61,79.527 27.61,81.285 EXP2.5@26.451,82.444
LCD_D5: EXP2.6 IC1.50 | length 17.8
  Top Layer w0.254: IC1.50@23.31,65.367 IC1.50@23.31,65.367 20.98,67.695 20.98,73.838 26.451,79.308 EXP2.6@26.451,79.904
LCD_D6: EXP2.7 IC1.51 | length 22.2
  Top Layer w0.254: IC1.51@21.76,63.817 20.786,63.817 20.526,64.077 20.526,74.026 25.171,78.671 25.171,81.183 EXP2.7@23.911,82.444
LCD_D7: EXP2.8 IC1.52 | length 19.6
  Top Layer w0.254: IC1.52@21.76,63.317 20.563,63.317 20.072,63.808 20.072,74.214 23.911,78.052 EXP2.8@23.911,79.904
LCD_ENA: EXP2.3 IC1.42 | length 25.3
  Top Layer w0.254: IC1.42@27.31,65.367 27.287,65.39 27.287,66.315 26.1,67.502 23.1,67.502 22.377,68.224 22.377,72.988 28.216,78.827 29.437,78.827 30.15,79.54 30.15,81.285 EXP2.3@28.991,82.444
LCD_RS: EXP2.4 IC1.45 | length 20.6
  Top Layer w0.254: IC1.45@25.81,65.367 25.787,65.39 25.787,66.457 25.196,67.048 22.912,67.048 21.92,68.04 21.92,73.173 28.651,79.904 EXP2.4@28.991,79.904
LED: IC1.26 R13.2 | length 11.3
  Top Layer w0.254: R13.2@35.183,75.692 36.373,74.502 36.373,68.885 35.31,67.822 IC1.26@35.31,65.367
MISO2: IC2.17 ISP2.1 | length 3.5
  Top Layer w0.254: ISP2.1@33.426,30.429 33.426,29.693 33.807,29.312 34.392,29.312 35.048,28.655 IC2.17@35.048,27.947
MOSI2: IC2.16 ISP2.4 | length 7.7
  Top Layer w0.254: ISP2.4@35.966,32.969 34.798,31.801 34.798,29.591 36.498,27.891 IC2.16@36.498,26.497
NetC12_2: C12.2 IC2.27 | length 4.3
  Top Layer w0.254: C12.2@25.338,27.008 25.447,26.899 25.959,26.899 26.822,26.035 26.822,25.019 27.026,24.816 28.017,24.816 IC2.27@28.098,24.897
NetC14_2: C14.2 IC2.1 R9.1 Y2.1 | length 8.7
  Top Layer w0.254: IC2.1@29.448,19.447 29.448,17.491 29.846,17.094 C14.2@29.846,16.143 ; C14.2@30.023,16.154 C14.2@30.201,16.154 ; Y2.1@30.201,12.725 C14.2@30.201,16.154 ; C14.2@30.201,16.332 C14.2@30.201,16.154 ; R9.1@31.687,16.154 C14.2@30.201,16.154
NetC15_2: C15.2 IC2.2 R9.2 Y2.2 | length 10.8
  Top Layer w0.254: IC2.2@30.248,19.547 30.248,17.986 30.886,17.348 33.045,17.348 33.387,17.006 R9.2@33.387,16.154 33.399,16.143 C15.2@35.146,16.143 ; Y2.2@34.773,12.725 C15.2@34.773,15.77
NetC18_1: C18.1 D5.2 IC4.6 L3.1 | length 11.3
  Top Layer w0.254: L3.1@117.424,34.112 L3.1@117.424,36.779 ; IC4.6@119.39,42.844 C18.1@121.138,42.844 ; D5.2@119.431,38.786 D5.2@119.431,39.802
  Top Layer w0.5: L3.1@117.424,36.779 D5.2@119.431,38.786 ; D5.2@119.39,39.842 IC4.6@119.39,42.844